# Altium PCB Hauptplatine.PcbDoc (part 3 of 3)
Units mm, origin at the board's own origin, x right, y up, seen from the top; angles counter-clockwise.
Board outline 110.5 x 110.5 mm, 4 copper layers (Top Layer, GND, POWER, Bottom Layer), stack 0.551 mm thick; 103 components, 92 nets, 407 pads, 378 vias.
Unrouted connection lines stored in the file: 3.
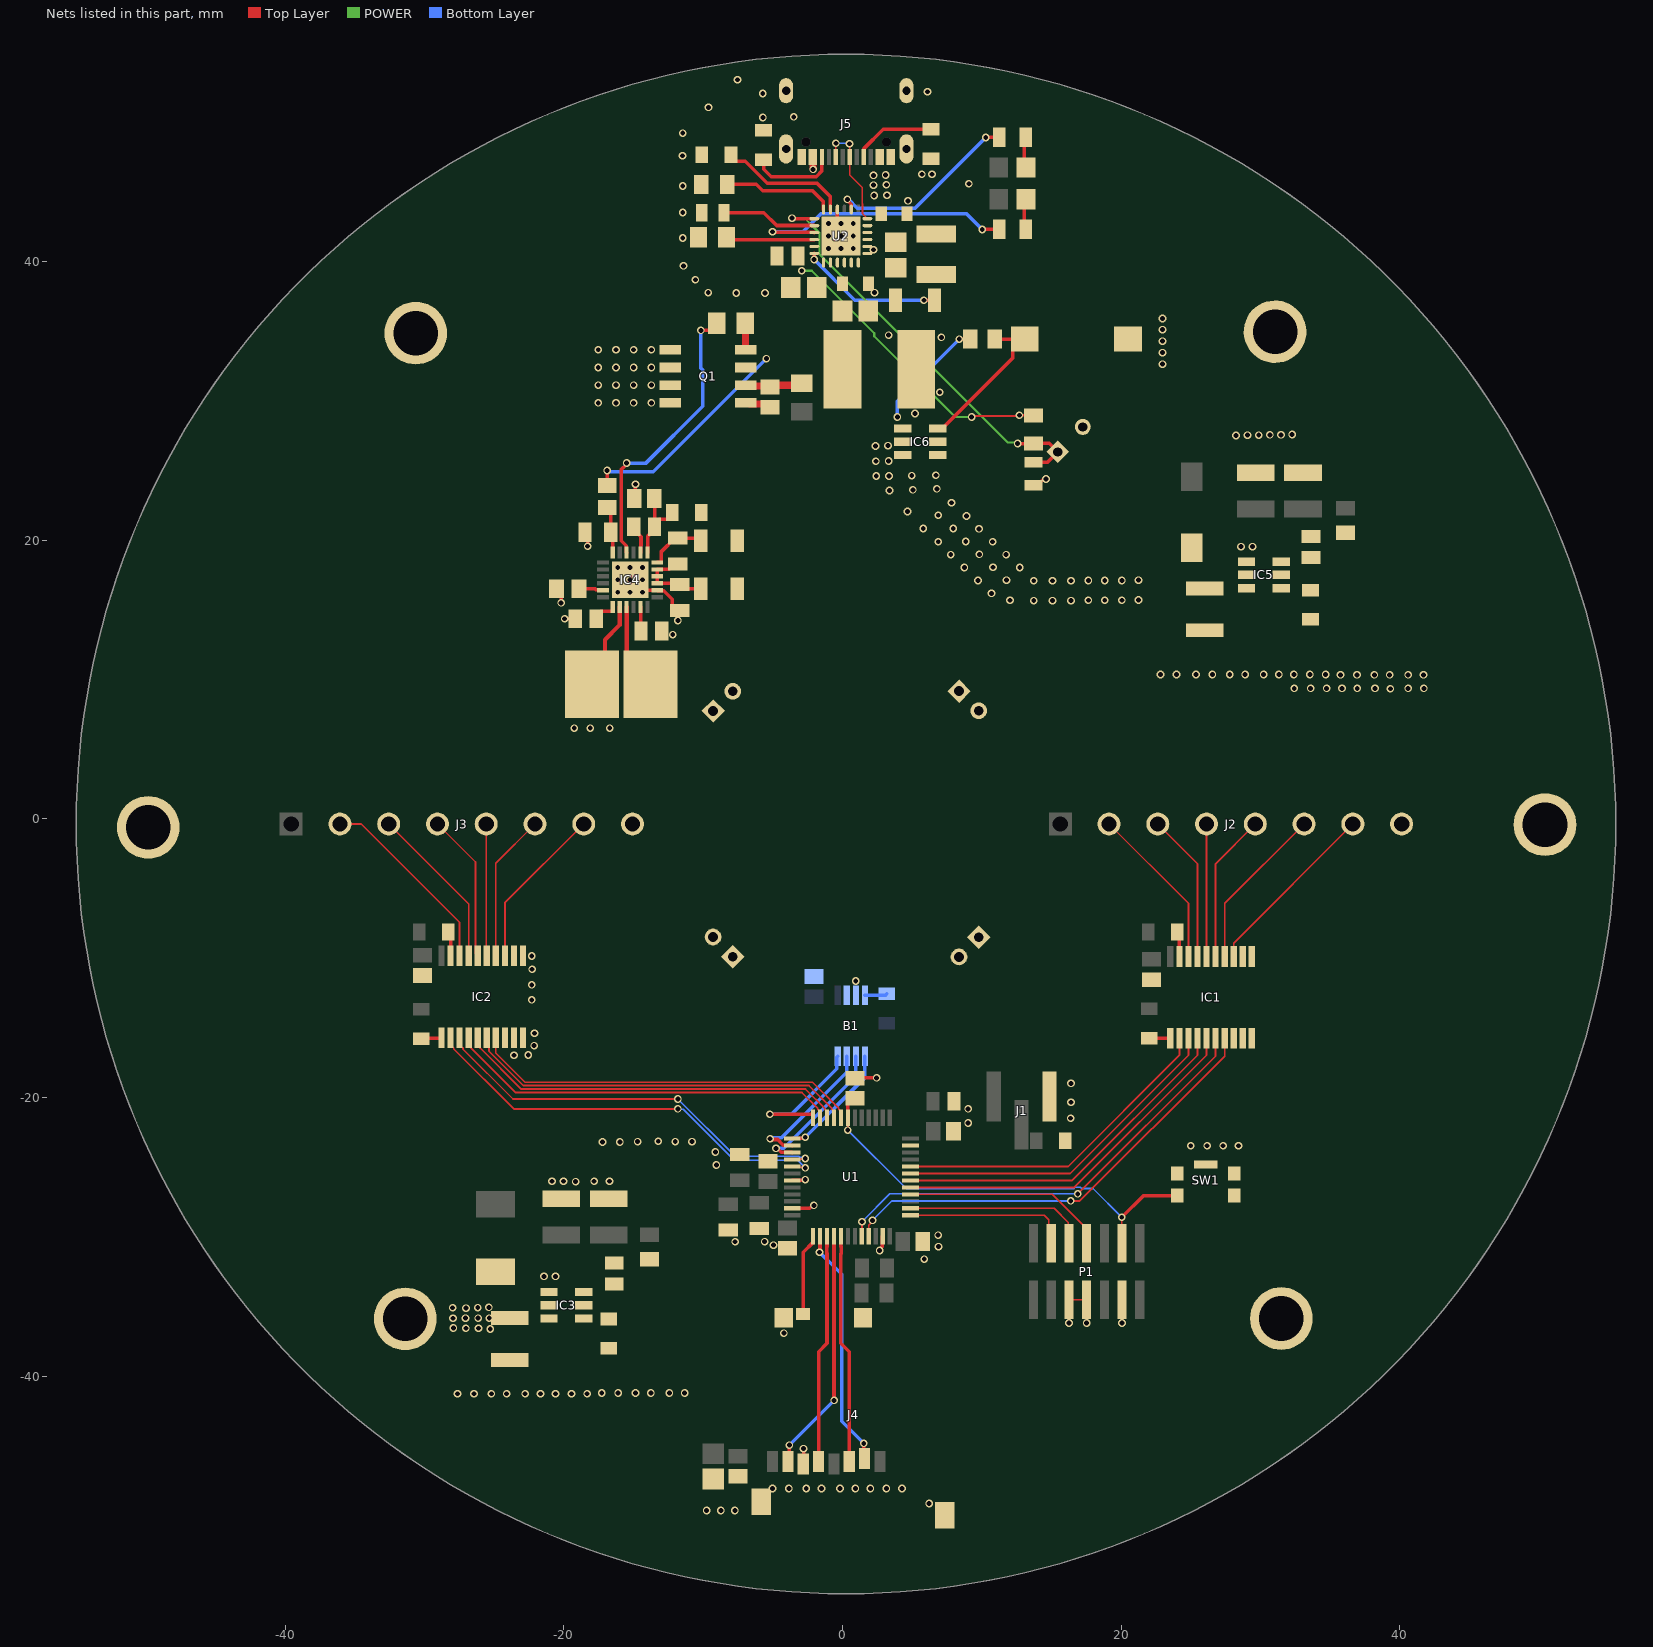
[diagram p4: the nets of this part, all layers, seen from the top]

## Via types
v1: diameter 0.55, hole 0.35, Top Layer to Bottom Layer, tented both sides, 378 vias

## Nets (pads, with @x,y where several pads share a name; then routed paths per layer and width w, separated by ;. In a path a pad name is that pad's centre, name@x,y a point inside that pad or via, vN(x,y) a via of type N, cw(c..) or ccw(c..) an arc to the next point about the centre after c; other vN are vias at no path point) (continued)
D_P: J5.A6 J5.B6 U2.24 | length 7.9
  Top Layer w0.11: J5.B6@-0.476,47.498 v1@-0.476,48.475 ; v1(0.5,48.445) 0.512,48.433 0.512,47.51 J5.A6@0.524,47.498 0.524,46.202 1.425,45.301 1.425,44.161 1.437,44.149 1.437,43.421 U2.24@1.79,43.068
  Bottom Layer w0.11: v1(-0.475,48.475) 0.47,48.475 v1(0.5,48.445)
DIS_FET: IC4.4 R15.1 | length 20.8
  Top Layer w0.254: v1(-15.494,25.527) -15.494,25.447 -15.875,25.066 -15.875,19.956 -15.513,19.594 -15.513,19.118 IC4.4@-15.49,19.095 ; v1(-10.16,35.052) -9.375,35.052 -9.017,35.41 R15.1@-9.017,35.56
  Bottom Layer w0.254: v1(-15.494,25.527) -14.097,25.527 -10.033,29.591 -10.033,32.218 -10.16,32.345 v1(-10.16,35.052)
GND: 32.2 B1.6 B1.7 C1.1 C2.1 C3.1 C4.1 C5.1 C6.1 C7.2 C8.2 C9.2 C10.2 C11.2 C12.1 C13.1 C14.1 C19.2 C20.2 C22.2 C27.2 C29.2 C30.2 C31.2 C32.2 C33.1 C34.2 C36.2 IC1.8 IC1.9 IC1.10 IC1.11 IC1.12 IC2.8 IC2.9 IC2.10 IC2.11 IC2.12 IC3.1 IC4.14 IC5.1 J1.3 J2.8 J3.8 J4.G1 J4.G2 J4.G3 J4.G4 J4.P6 J5.A1/B12 J5.A12/B1 J5.Shell MH1.1 MH2.1 MH3.1 MH4.1 MH5.1 MH6.1 P1.5 P1.7 P1.11 R5.2 R11.2 R14.2 R17.1 R21.2 R22.2 R23.2 R24.2 R25.1 R26.1 R28.2 R29.2 S1.1 SW1.A1 SW1.A2 SW1.G1 U1.19 U1.23 U1.35 U1.47 U2.4 U2.19 U2.20 U2.25 | length 24
  Top Layer w0.125: v1(16.256,-36.195) P1.5@16.256,-34.52 P1.7@17.526,-34.52 v1(17.526,-36.195) ; v1(20.066,-36.195) P1.11@20.066,-34.52
  Top Layer w0.254: IC2.8@-24.228,-15.712 IC2.8@-24.215,-15.725 ; C8.2@-8.212,-29.515 -8.052,-29.515 C8.2@-7.992,-29.575 ; C11.2@-7.493,-47.207 C11.2@-7.239,-47.461 ; C9.2@-5.969,-29.409 C9.2@-5.936,-29.409 ; J4.G2@-5.813,-49.008 -5.813,-48.96 J4.G2@-5.5,-48.647 ; C36.2@-4.699,40.386 C36.2@-4.699,40.586 ; v1@-4.213,-36.92 v1(-4.207,-36.926) ; J5.Shell@-4.046,48.068 J5.Shell@-3.919,47.941 ; J5.Shell@-4.046,51.972 J5.Shell@-4.046,52.248 ; U1.23@-3.611,-27.963 -2.343,-27.963 -2.13,-27.75 v1(-2.05,-27.75) ; U1.19@-3.611,-25.963 -3.588,-25.94 -2.699,-25.94 v1(-2.667,-25.908) ; J4.P6@-2.813,-46.328 -2.794,-46.309 v1(-2.794,-45.212) ; U2.4@-0.363,43.721 -0.363,42.068 v1(-0.113,41.818) ; C14.1@0.889,-18.616 0.905,-18.6 v1(2.45,-18.6) ; J4.G3@1.397,-35.918 J4.G3@1.487,-35.828 ; v1(2.667,-30.988) 2.667,-30.908 2.866,-30.709 2.866,-29.986 U1.35@2.889,-29.963 ; J5.A1/B12@3.474,47.228 J5.A1/B12@3.474,47.498 ; J5.Shell@4.594,47.456 J5.Shell@4.594,48.068 ; J5.Shell@4.594,51.78 J5.Shell@4.594,52.248 ; C27.2@4.637,43.427 C27.2@4.699,43.489 ; R28.2@6.2,47.371 R28.2@6.35,47.371 ; v1(6.223,-49.149) v1@6.229,-49.155 ; v1@8.974,-21.887 v1(9.017,-21.844) ; v1(9.017,-20.828) v1(9.017,-20.828) ; R23.2@13.716,23.938 13.991,23.938 14.38,24.327 14.548,24.327 v1(14.605,24.384) ; R5.2@16.002,-23.114 R5.2@16.002,-22.964 ; S1.1@20.447,34.383 S1.1@20.481,34.417
  Top Layer w0.305: R14.2@-17.05,11.212 -17.05,12.838 -15.99,13.898 IC4.14@-15.99,15.195
  Bottom Layer w0.254: v1(0.958,-11.646) v1@0.964,-11.652
  other v1: -9.75,-49.65 -8.725,-49.65 -7.725,-49.65 -5.025,-48.075 -3.85,-48.075 -2.6,-48.075 -1.5,-48.075 -0.175,-48.075 0.925,-48.075 2,-48.075 3.15,-48.075 4.275,-48.075 -27.625,-41.275 -26.45,-41.275 -25.2,-41.275 -24.1,-41.275 -22.775,-41.275 -21.675,-41.275 -20.6,-41.275 -19.45,-41.275 -18.325,-41.275 -17.275,-41.225 -16.1,-41.225 -14.85,-41.225 -13.75,-41.225 -12.425,-41.225 -11.325,-41.225 -21.425,-32.85 -20.6,-32.85 5.867,-31.613 6.892,-30.713 -4.953,-30.607 -7.704,-30.368 -5.588,-30.353 6.867,-29.888 -19.15,-26.05 -20.85,-26.025 -20.025,-26.025 -17.825,-26.025 -16.725,-26.025 -9.05,-24.85 -9.125,-23.925 25,-23.475 26.175,-23.475 27.325,-23.475 28.425,-23.475 -17.225,-23.2 -15.975,-23.2 -14.7,-23.175 -12,-23.175 -10.8,-23.175 -13.225,-23.15 16.375,-21.5 16.4,-20.35 16.4,-19 -23.575,-16.975 -22.554,-16.96 -22.129,-16.285 -22.1,-15.4 -22.297,-13.003 -22.297,-11.928 -22.272,-10.803 -22.297,-9.853 -19.25,6.5 -18.1,6.5 -16.7,6.5 39.325,9.325 32.425,9.35 33.6,9.35 34.75,9.35 35.85,9.35 36.95,9.35 38.225,9.35 40.6,9.35 41.725,9.35 35.75,10.325 36.925,10.325 38.175,10.325 39.275,10.325 40.6,10.325 41.7,10.325 22.825,10.35 23.975,10.35 25.375,10.35 26.55,10.35 27.8,10.35 28.9,10.35 30.225,10.35 31.325,10.35 32.4,10.35 33.55,10.35 34.675,10.35 28.6,19.525 29.425,19.525 28.25,27.5 29.075,27.525 29.875,27.525 30.675,27.55 31.475,27.55 32.275,27.575 5.207,29.083 6.985,30.607 22.975,32.625 22.975,33.45 22.975,34.275 7.095,34.544 3.316,34.706 22.975,35.1 22.975,35.9 -7.625,37.725 -5.561,37.731 -9.636,37.756 2.3,37.754 -10.561,38.681 -11.411,39.681 2.228,40.83 -1.002,40.929 -0.113,40.929 0.776,40.929 -11.461,41.681 -1.002,41.818 0.776,41.818 -1.002,42.707 -0.113,42.707 0.776,42.707 -11.461,43.506 4.699,44.34 -11.461,45.406 9.075,45.575 5.7,46.25 6.425,46.25 -11.486,47.581 -11.461,49.206 -5.711,50.331 -3.5,50.375 -9.611,51.056 -5.725,52.05 6.1,52.175 -7.536,53.031
Hall_MISO: B1.3 U1.14 | length 10.4
  Top Layer w0.254: v1(-5.188,-22.97) -5.131,-23.026 -4.654,-23.026 -4.24,-23.44 -3.634,-23.44 U1.14@-3.611,-23.463
  Bottom Layer w0.254: v1(-5.188,-22.97) -5.131,-22.913 -4.388,-22.913 0.314,-18.211 B1.3@0.314,-17.059
Hall_MOSI: B1.2 U1.15 | length 10.6
  Top Layer w0.254: v1(-4.766,-23.66) -4.686,-23.66 -4.406,-23.94 -3.634,-23.94 U1.15@-3.611,-23.963
  Bottom Layer w0.254: v1(-4.766,-23.66) -4.212,-23.66 0.964,-18.484 B1.2@0.964,-17.059
Hall_NSS: B1.4 U1.12 | length 10.4
  Top Layer w0.254: v1(-5.207,-21.209) -2.134,-21.209 -2.111,-21.232 U1.12@-2.111,-21.463
  Bottom Layer w0.254: v1(-5.207,-21.209) -3.659,-21.209 -0.4,-17.95 -0.4,-17.123 B1.4@-0.336,-17.059
Hall_SCK: B1.1 U1.13 | length 8.6
  Top Layer w0.254: U1.13@-3.611,-22.963 -3.588,-22.94 -2.827,-22.94 -2.747,-22.86 v1(-2.667,-22.86)
  Bottom Layer w0.254: v1(-2.667,-22.86) 1.614,-18.579 B1.1@1.614,-17.059
IC1_SW: C18.2 IC3.2 L1.1
IC2_SW: C28.2 IC5.2 L2.1
Matrix1_1: IC2.2 U1.17 | length 30.7
  Top Layer w0.125: IC2.2@-28.128,-15.712 -28.128,-16.225 -27.89,-16.462 -27.89,-16.527 -23.59,-20.828 v1(-11.811,-20.828) ; U1.17@-3.611,-24.963 -3.563,-25.011 -2.715,-25.011 v1(-2.667,-25.059)
  Bottom Layer w0.125: v1(-11.811,-20.828) -11.786,-20.853 -11.432,-20.853 -7.774,-24.511 -3.215,-24.511 v1(-2.667,-25.059)
Matrix1_2: IC2.3 U1.16 | length 29.7
  Top Layer w0.125: IC2.3@-27.478,-15.712 -27.478,-16.225 -27.24,-16.462 -27.24,-16.527 -23.648,-20.12 v1(-11.811,-20.12) ; U1.16@-3.611,-24.463 -3.571,-24.423 -2.706,-24.423 v1(-2.667,-24.384)
  Bottom Layer w0.125: v1(-11.811,-20.12) -7.704,-24.227 -3.146,-24.227 -3.07,-24.303 -2.748,-24.303 v1(-2.667,-24.384)
Matrix1_3: IC2.4 U1.11 | length 28.2
  Top Layer w0.125: IC2.4@-26.828,-15.712 -26.665,-15.875 -26.665,-16.452 -23.46,-19.658 -2.901,-19.658 -1.773,-20.785 -1.773,-20.851 -1.611,-21.013 U1.11@-1.611,-21.463
Matrix1_4: IC2.5 U1.10 | length 28.1
  Top Layer w0.125: IC2.5@-26.178,-15.712 -26.015,-15.875 -26.015,-16.452 -23.06,-19.408 -2.651,-19.408 -1.273,-20.785 -1.273,-20.85 -1.111,-21.013 U1.10@-1.111,-21.463
Matrix1_5: IC2.6 U1.9 | length 28.1
  Top Layer w0.125: IC2.6@-25.528,-15.712 -25.365,-15.875 -25.365,-16.682 -22.89,-19.158 -2.401,-19.158 -0.773,-20.785 -0.773,-20.851 -0.611,-21.013 U1.9@-0.611,-21.463
Matrix1_6: IC2.7 U1.8 | length 28.1
  Top Layer w0.125: IC2.7@-24.878,-15.712 -24.878,-16.816 -22.787,-18.908 -2.151,-18.908 -0.273,-20.785 -0.273,-20.851 -0.111,-21.013 U1.8@-0.111,-21.463
Matrix1_NOE: IC2.19 R4.2 | length 1.7
  Top Layer w0.254: R4.2@-28.325,-8.202 -28.128,-8.399 IC2.19@-28.128,-9.836
Matrix2_1: IC1.2 U1.44 | length 23.8
  Top Layer w0.125: U1.44@4.889,-24.963 16.197,-24.963 24.182,-16.978 IC1.2@24.182,-15.765
Matrix2_2: IC1.3 U1.43 | length 24.7
  Top Layer w0.125: U1.43@4.889,-25.463 16.347,-25.463 24.832,-16.978 IC1.3@24.832,-15.765
Matrix2_3: IC1.4 U1.42 | length 25.5
  Top Layer w0.125: U1.42@4.889,-25.963 16.497,-25.963 25.482,-16.978 IC1.4@25.482,-15.765
Matrix2_4: IC1.5 U1.41 | length 26.4
  Top Layer w0.125: U1.41@4.889,-26.463 16.647,-26.463 26.132,-16.978 IC1.5@26.132,-15.765
Matrix2_5: IC1.6 U1.32 | length 32.6
  Top Layer w0.125: U1.32@1.389,-29.963 1.396,-29.956 1.396,-28.931 v1(1.402,-28.924) ; v1(16.891,-26.924) 26.782,-17.033 IC1.6@26.782,-15.765
  Bottom Layer w0.125: v1(1.402,-28.924) 3.402,-26.924 v1(16.891,-26.924)
Matrix2_6: IC1.7 U1.33 | length 32.7
  Top Layer w0.125: U1.33@1.889,-29.963 1.889,-29.175 2.159,-28.905 v1(2.159,-28.829) ; v1(16.383,-27.432) 17.037,-27.432 27.432,-17.037 IC1.7@27.432,-15.765
  Bottom Layer w0.125: v1(2.159,-28.829) 3.556,-27.432 v1(16.383,-27.432)
Matrix2_NOE: IC1.19 R2.2 | length 1.8
  Top Layer w0.254: R2.2@24.044,-8.128 24.182,-8.266 IC1.19@24.182,-9.889
NetB1_8: B1.8 R6.2 | length 1.6
  Bottom Layer w0.254: B1.8@1.614,-12.659 3.089,-12.659 R6.2@3.175,-12.573
NetC15_1: C15.1 IC4.2 | length 2.1
  Top Layer w0.254: C15.1@-14.986,20.955 -14.986,20.755 -14.459,20.228 -14.459,19.594 -14.467,19.586 -14.467,19.118 IC4.2@-14.49,19.095
NetC15_2: C15.2 C16.2 IC4.1 R32.2 | length 5.9
  Top Layer w0.254: IC4.1@-13.99,19.095 -13.99,20.251 -13.486,20.755 C15.2@-13.486,20.955 ; C16.2@-13.462,22.86 -13.486,22.836 C15.2@-13.486,20.955 ; R32.2@-12.226,21.971 -12.226,21.821 -12.549,21.498 -13.138,21.498 -13.486,21.15 C15.2@-13.486,20.955
NetC17_1: C17.1 IC4.6 R7.1 | length 3.2
  Top Layer w0.254: R7.1@-16.764,22.225 -16.637,22.098 C17.1@-16.637,20.574 -16.49,20.427 IC4.6@-16.49,19.095
NetC18_1: C18.1 IC3.6
NetC21_1: C21.1 IC4.24 R9.2 | length 4.4
  Top Layer w0.254: IC4.24@-13.29,18.395 -13.015,18.395 -12.992,18.418 -12.992,19.182 -12.036,20.138 C21.1@-11.811,20.138 -10.359,20.138 R9.2@-10.16,19.939
NetC21_2: C21.2 C23.1 IC4.21 IC4.22 IC4.23 R10.2 | length 5.9
  Top Layer w0.254: C21.2@-11.811,18.288 -12.036,18.288 -12.429,17.895 IC4.23@-13.29,17.895 IC4.22@-13.29,17.395 IC4.21@-13.29,16.895 -11.815,16.895 -11.811,16.891 -11.463,16.543 -11.052,16.543 -11.019,16.51 R10.2@-10.16,16.51
NetC24_1: C24.1 Q1.2 R13.2 | length 3.9
  Top Layer w0.508: Q1.2@-6.94,31.115 -6.876,31.051 -5.271,31.051 C24.1@-5.207,30.988 -5.083,31.112 -3.32,31.112 R13.2@-3.197,31.235
NetC25_1: C25.1 IC4.17 | length 1.7
  Top Layer w0.254: IC4.17@-14.49,15.195 -14.467,15.172 -14.467,14.741 -14.466,14.74 C25.1@-14.466,13.462
NetC26_1: C26.1 IC4.13 | length 1.8
  Top Layer w0.254: C26.1@-17.677,14.351 -17.677,14.551 -17.329,14.899 -16.513,14.899 -16.49,14.922 IC4.13@-16.49,15.195
NetC28_1: C28.1 IC5.6
NetC35_1: C35.1 C37.2 L3.1 U2.17 U2.18
NetC35_2: C35.2 U2.12 | length 10.3
  Top Layer w0.254: v1(-2.032,40.132) -2.024,40.14 -2.024,40.561 U2.12@-2.016,40.568 ; v1(5.842,37.211) C35.2@6.61,37.211
  Bottom Layer w0.254: v1(-2.032,40.132) 0.889,37.211 v1(5.842,37.211)
NetC37_1: C37.1 L3.2 U2.21 U2.22
NetIC1_1: IC1.1 R1.2 | length 1.5
  Top Layer w0.254: R1.2@22.012,-15.748 23.515,-15.748 IC1.1@23.532,-15.765
NetIC1_13: IC1.13 J2.7 | length 13
  Top Layer w0.125: IC1.13@28.082,-9.889 28.082,-8.931 J2.7@36.632,-0.381
NetIC1_14: IC1.14 J2.6 | length 11.9
  Top Layer w0.125: IC1.14@27.432,-9.889 27.432,-6.081 J2.6@33.132,-0.381
NetIC1_15: IC1.15 J2.5 | length 10.7
  Top Layer w0.125: IC1.15@26.782,-9.889 26.782,-3.231 J2.5@29.632,-0.381
NetIC1_16: IC1.16 J2.4 | length 9.5
  Top Layer w0.125: IC1.16@26.132,-9.889 J2.4@26.132,-0.381
NetIC1_17: IC1.17 J2.3 | length 10.7
  Top Layer w0.125: J2.3@22.632,-0.381 25.482,-3.231 IC1.17@25.482,-9.889
NetIC1_18: IC1.18 J2.2 | length 11.9
  Top Layer w0.125: J2.2@19.132,-0.381 24.832,-6.081 IC1.18@24.832,-9.889
NetIC2_1: IC2.1 R3.2 | length 1.3
  Top Layer w0.254: R3.2@-30.044,-15.763 -28.829,-15.763 IC2.1@-28.778,-15.712
NetIC2_13: IC2.13 J3.7 | length 11.8
  Top Layer w0.125: IC2.13@-24.228,-9.836 -24.228,-6.041 J3.7@-18.568,-0.381
NetIC2_14: IC2.14 J3.6 | length 10.6
  Top Layer w0.125: IC2.14@-24.878,-9.836 -24.878,-3.191 J3.6@-22.068,-0.381
NetIC2_15: IC2.15 J3.5 | length 9.5
  Top Layer w0.125: J3.5@-25.568,-0.381 -25.568,-9.796 IC2.15@-25.528,-9.836
NetIC2_16: IC2.16 J3.4 | length 10.7
  Top Layer w0.125: J3.4@-29.068,-0.381 -26.34,-3.109 -26.34,-9.674 IC2.16@-26.178,-9.836
NetIC2_17: IC2.17 J3.3 | length 11.8
  Top Layer w0.125: J3.3@-32.568,-0.381 -26.828,-6.121 IC2.17@-26.828,-9.836
NetIC2_18: IC2.18 J3.2 | length 13.9
  Top Layer w0.125: J3.2@-36.068,-0.381 -34.544,-0.381 -27.478,-7.447 IC2.18@-27.478,-9.836
NetIC3_4: IC3.4 R8.1 R11.1
NetIC4_11: IC4.11 R12.1 | length 1.5
  Top Layer w0.254: R12.1@-18.669,16.51 -17.748,16.51 -17.656,16.418 -17.213,16.418 IC4.11@-17.19,16.395
NetIC5_4: IC5.4 R19.1 R24.1
NetIC6_3: IC6.3 R27.1 S1.2 | length 11.4
  Top Layer w0.254: IC6.3@6.838,28.001 7.163,28.001 12.208,33.046 12.208,33.644 12.981,34.417 S1.2@13.081,34.417 R27.1@10.922,34.417
NetJ5_A5: J5.A5 R28.1 | length 6
  Top Layer w0.254: J5.A5@1.524,47.498 1.547,47.521 1.547,48.097 2.921,49.471 R28.1@6.35,49.471
NetJ5_B5: J5.B5 R29.1 | length 6.3
  Top Layer w0.254: R29.1@-5.675,47.3 -5.643,47.268 -5.643,46.618 -5.099,46.074 -1.89,46.074 -1.476,46.487 J5.B5@-1.476,47.498
NetLED1_1: LED1.1 U2.2 | length 14
  Top Layer w0.254: v1(0.355,44.45) 0.355,44.37 0.63,44.095 0.63,43.728 U2.2@0.637,43.721 ; v1(10.287,48.895) LED1.1@11.115,48.895
  Bottom Layer w0.254: v1(0.355,44.45) 0.434,44.45 1.071,43.813 5.205,43.813 v1(10.287,48.895)
NetLED1_2: LED1.2 R16.1 | length 2.2
  Top Layer w0.254: LED1.2@13.015,48.895 13.041,48.869 R16.1@13.041,46.736
NetLED2_1: LED2.1 U2.9 | length 20.2
  Top Layer w0.254: v1(-5.025,42.125) -4.975,42.075 -2.023,42.075 U2.9@-2.016,42.068 ; v1(10.033,42.291) LED2.1@11.115,42.291
  Bottom Layer w0.254: v1(-5.025,42.125) -2.833,42.125 -1.524,43.434 8.89,43.434 v1(10.033,42.291)
NetLED2_2: LED2.2 R18.1 | length 2.2
  Top Layer w0.254: LED2.2@13.015,42.291 13.041,42.317 R18.1@13.041,44.45
NetQ1_4: Q1.4 R15.2 | length 1.7
  Top Layer w0.508: R15.2@-6.961,35.38 -6.961,33.676 Q1.4@-6.94,33.655
NetQ1_5: Q1.5 Q1.6 Q1.7 Q1.8
  other v1: -17.526,29.845 -16.256,29.845 -14.986,29.845 -13.716,29.845 -17.526,31.115 -16.256,31.115 -14.986,31.115 -13.716,31.115 -17.526,32.385 -16.256,32.385 -14.986,32.385 -13.716,32.385 -17.526,33.655 -16.256,33.655 -14.986,33.655 -13.716,33.655
NetR17_2: R17.2 U2.6 | length 8
  Top Layer w0.254: R17.2@-8.275,45.525 -6.175,45.525 -5.725,45.075 -2.15,45.075 -1.363,44.288 U2.6@-1.363,43.721
NetR21_1: R21.1 U2.10 | length 6.2
  Top Layer w0.254: R21.1@-8.25,41.568 U2.10@-2.016,41.568
NetR25_2: R25.2 U2.5 | length 9.4
  Top Layer w0.254: R25.2@-8,47.65 -8,47.5 -7.677,47.177 -6.977,47.177 -5.4,45.6 -1.825,45.6 -0.863,44.638 U2.5@-0.863,43.721
NetR26_2: R26.2 U2.8 | length 6.9
  Top Layer w0.254: R26.2@-8.5,43.5 -5.641,43.5 -4.716,42.575 -2.023,42.575 U2.8@-2.016,42.568
NRST: C14.2 P1.12 SW1.B1 SW1.B2 U1.7 | length 31.4
  Top Layer w0.125: v1(0.381,-22.352) 0.389,-22.344 U1.7@0.389,-21.463 ; v1(20.047,-28.607) 20.047,-30.461 P1.12@20.066,-30.48
  Top Layer w0.254: U1.7@0.389,-21.463 0.389,-20.464 0.787,-20.066 C14.2@0.889,-20.066 ; v1(20.047,-28.607) 21.604,-27.05 SW1.B1@24.025,-27.05
  Bottom Layer w0.125: v1(0.381,-22.352) 4.572,-26.543 16.618,-26.543 16.699,-26.461 17.083,-26.461 17.164,-26.543 17.984,-26.543 v1(20.047,-28.607)
REGN: C36.1 R20.1 U2.11 | length 21.6
  Top Layer w0.158: v1(9.271,28.829) 9.335,28.892 12.636,28.892 v1(12.7,28.956) 13.7,28.956 R20.1@13.716,28.94
  Top Layer w0.254: C36.1@-3.199,40.186 C36.1@-3.199,40.386 C36.1@-3.199,40.586
  POWER w0.158: v1(-2.925,39.325) -2.2,39.325 2.284,34.841 2.284,34.631 8.086,28.829 v1(9.271,28.829)
SD_DETECT: J4.P9 U1.25 | length 5.9
  Top Layer w0.254: J4.P9@-2.823,-35.553 -2.823,-31.125 -2.111,-30.413 U1.25@-2.111,-29.963
SD_MISO: J4.P7 U1.28 | length 17.5
  Top Layer w0.254: J4.P7@-3.913,-46.128 -3.81,-46.025 v1(-3.81,-44.958) ; U1.28@-0.611,-29.963 -0.606,-29.968 -0.606,-41.744 v1(-0.601,-41.749)
  Bottom Layer w0.254: v1(-3.81,-44.958) v1(-0.601,-41.749)
SD_MOSI: J4.P3 U1.29 | length 16.4
  Top Layer w0.254: U1.29@-0.111,-29.963 -0.111,-30.705 -0.074,-30.741 -0.074,-31.178 -0.111,-31.215 -0.111,-37.66 0.487,-38.258 J4.P3@0.487,-46.128
SD_NSS: J4.P2 U1.26 | length 17.3
  Top Layer w0.254: v1(-1.651,-31.115) -1.611,-31.075 U1.26@-1.611,-29.963 ; v1(1.524,-44.831) 1.524,-45.865 J4.P2@1.587,-45.928
  Bottom Layer w0.254: v1(-1.651,-31.115) -0.063,-32.703 -0.063,-43.244 v1(1.524,-44.831)
SD_SCK: J4.P5 U1.27 | length 16.4
  Top Layer w0.254: J4.P5@-1.713,-46.128 -1.713,-38.26 -1.111,-37.658 -1.111,-31.195 -1.124,-31.182 -1.124,-30.897 -1.128,-30.893 -1.128,-30.741 -1.111,-30.724 U1.27@-1.111,-29.963
SWCLK: P1.6 U1.38 | length 13.3
  Top Layer w0.125: U1.38@4.889,-27.963 15.188,-27.963 16.211,-28.986 16.211,-30.435 P1.6@16.256,-30.48
SWDIO: P1.4 U1.37 | length 11.8
  Top Layer w0.125: U1.37@4.889,-28.463 14.488,-28.463 14.8,-28.775 14.8,-30.294 P1.4@14.986,-30.48
SWO: P1.8 U1.40 | length 14.7
  Top Layer w0.125: U1.40@4.889,-26.963 15.064,-26.963 17.526,-29.425 P1.8@17.526,-30.48
TS: R20.2 R22.1 R23.1 U2.7 | length 30.6
  Top Layer w0.254: v1(-3.625,43.102) -3.598,43.075 -2.023,43.075 U2.7@-2.016,43.068 ; v1(12.573,26.924) 13.7,26.924 R20.2@13.716,26.94 14.839,26.94 R22.1@15.452,26.327 14.717,25.592 R23.1@13.716,25.592
  POWER w0.158: v1(-3.625,43.102) -2.716,43.102 -1.651,42.037 -1.651,40.513 11.863,26.999 12.498,26.999 v1(12.573,26.924)
VBAT: C19.1 Q1.3 R7.2 U2.13 U2.14 | length 15.7
  Top Layer w0.254: R7.2@-16.891,23.908 v1(-16.891,24.987)
  Bottom Layer w0.254: v1@-16.764,24.892 -13.589,24.892 v1(-5.461,33.02)
VBOT: C16.1 C17.2 C23.2 C25.2 C26.2 IC4.15 IC4.20 IC4.25 P4.1 P5.1 R12.2 R14.1 | length 16.3
  Top Layer w0.254: R12.2@-20.511,16.51 -20.193,16.192 v1(-20.193,15.494) ; v1(-19.939,14.351) C26.2@-19.177,14.351 ; C17.2@-18.487,20.574 -18.288,20.375 v1(-18.288,19.558) ; v1(-15.24,17.145) -14.49,16.395 IC4.20@-13.29,16.395 -13.267,16.372 -12.836,16.372 -12.212,15.748 -12.212,15.298 -11.864,14.95 C23.2@-11.684,14.95 -11.811,14.823 v1(-11.811,14.224) ; C16.1@-14.912,22.86 -14.859,22.913 v1(-14.859,24.003) ; C25.2@-12.966,13.462 C25.2@-12.712,13.208
  Top Layer w0.305: IC4.15@-15.49,15.195 -15.49,11.365 R14.1@-13.775,9.65
  other v1: -12.18,13.208 -16.129,16.256 -15.24,16.256 -14.351,16.256 -16.129,17.145 -14.351,17.145 -16.129,18.034 -15.24,18.034 -14.351,18.034
VBUS: C27.1 J5.A4/B9 J5.A9/B4 U2.23 | length 0.9
  Top Layer w0.508: J5.A9/B4@-2.126,47.498 -2.126,46.619 v1(-2.108,46.601) ; v1(2.225,46.175) v1@2.233,46.183
  other v1: 2.275,44.725 3.2,44.75 2.225,45.475 3.15,45.5 3.1,46.2
VMID: P2.1 P3.1 P4.2 P5.2 R10.1
VSWITCH: C29.1 C30.1 C33.2 IC6.4 R27.2 U2.15 U2.16 | length 8.2
  Top Layer w0.254: v1(8.382,34.417) R27.2@9.168,34.417
  Bottom Layer w0.254: v1(3.937,28.829) 3.937,29.972 v1(8.382,34.417)
VSYS: C22.1 C34.1 IC3.3 IC3.5 IC5.3 IC5.5 IC6.1 IC6.2 IC6.5 IC6.6
  other v1: -25.276,-36.621 -27.026,-36.571 -26.126,-36.571 -27.925,-36.55 -27.95,-35.85 -27.051,-35.846 -26.151,-35.846 -25.351,-35.846 -27.025,-35.125 -27.975,-35.1 -26.176,-35.096 -25.376,-35.071 13.725,15.65 15.075,15.65 16.4,15.65 12.021,15.674 17.65,15.675 18.825,15.675 20.05,15.675 21.25,15.7 10.7,16.175 13.725,17.075 15.075,17.075 16.4,17.075 9.725,17.1 17.65,17.1 18.825,17.1 20.05,17.1 11.775,17.125 21.25,17.125 8.75,18.025 12.725,18.025 10.8,18.05 7.775,18.95 11.75,18.95 9.825,18.975 6.875,19.875 10.775,19.875 8.85,19.9 9.8,20.8 5.8,20.825 7.95,20.825 8.9,21.725 6.875,21.775 4.671,22.049 7.825,22.675 3.375,23.55 5.05,23.6 6.775,23.675 3.339,24.599 2.425,24.6 4.975,24.625 6.7,24.65 2.4,25.65 3.314,25.674 2.375,26.75 3.264,26.774
VTOP: C24.2 P2.2 P3.2 Q1.1 R9.1 R32.1 | length 1.9
  Top Layer w0.508: Q1.1@-6.94,29.845 -6.775,29.845 -6.679,29.749 -5.418,29.749 C24.2@-5.207,29.538
pads on no net: IC4.5 IC4.7 IC4.10 IC4.12 IC4.16 IC4.18 IC4.19 J4.P1 J4.P8 J5.A8 J5.B8 J5.MH1 J5.MH2 P1.1 P1.2 P1.9 P1.10 P1.13 P1.14 U1.2 U1.3 U1.4 U1.5 U1.6 U1.18 U1.22 U1.34 U1.39 U1.46 U2.3

## Polygon pours and split planes (outlines as drawn)
REGN on Top Layer "REGN_L01_P276" (solid, pour order 276): -2.525,40.775 -2.45,40.85 -1.775,40.85 -1.65,40.975 -1.65,41.175 -1.775,41.3 -3.675,41.3 -3.813,41.162 -3.813,39.794 -3.043,39.025 -2.725,39.025 -2.525,39.225
VBAT on Top Layer (solid, pour order 275): -1.522,40.178 -1.42,40.28 -0.801,40.28 -0.703,40.182 -0.718,37.884 -1.196,37.288 -1.196,36.904 -1.625,36.475 -1.625,34.372 -1.63,34.367 -1.625,34.362 -1.625,32.25 -1.775,32.1 -3.9,32.1 -4.123,31.877 -7.677,31.877 -7.811,32.011 -7.811,32.739 -7.657,32.893 -5.969,32.893 -5.75,33.112 -5.75,36.65 -5.375,37.025 -2.9,37.025 -2.633,37.292 -2.633,38.883 -1.522,39.994
VSWITCH on Top Layer (solid, pour order 266): 2.45,34.9 2.009,35.341 1.157,35.341 0.825,35.674 0.825,37.706 0.775,37.756 0.775,39.104 0.375,39.504 0.375,40.175 0.264,40.286 -0.411,40.289 -0.575,40.125 -0.575,37.587 -0.962,37.2 -0.962,36.838 -1.383,36.417 -1.383,28.001 -0.856,27.525 4.925,27.525 5.066,27.666 5.066,28.084 2.45,30.7
VTOP on Top Layer "Top Layer-VTOP" (solid, pour order 115): -4.445,28.62 -2.735,26.91 -1.61,26.91 14.025,11.275 14.025,-13.025 11.9,-15.15 11.913,-15.163 10.887,-15.163 5.81,-10.085 5.81,-8.215 9.906,-4.119 9.906,3.702 8.166,5.441 8.16,5.435 8.16,7.271 9.657,8.768 9.65,9.273 -0.127,19.05 -8.5,19.05 -8.725,19.275 -8.725,19.3 -8.725,20.825 -8.982,21.082 -10.414,21.082 -10.668,21.336 -10.668,22.606 -10.668,29.332 -9.774,30.226 -4.7,30.226 -4.45,29.976 -4.445,29.975
GND on Top Layer "GND_L01_P267" (solid, pour order 267): 0.95,38.9 1.15,39.1 2.525,39.1 3.075,38.55 3.075,36.275 3.1,36.275 3.275,36.1 6.9,36.1 7.5,35.5 7.5,29 7.125,28.625 4.85,28.625 2.725,30.75 2.725,35.1 2.325,35.5 1.275,35.5 0.95,35.825
GND on Top Layer (solid, pour order 251): -11.875,38.975 -10.175,37.275 -3.05,37.275 -2.925,37.4 -2.925,38.7 -3.95,39.725 -3.95,41.075 -4.1,41.225 -5.2,41.225 -5.675,40.75 -8.95,40.75 -9.45,41.25 -9.45,48 -8.925,48.525 -7.5,48.525 -6.975,48 -4.9,48 -4.725,47.825 -4.725,47 -4.475,46.75 -2.625,46.75 -2.525,46.85 -2.525,47.825 -3.125,48.425 -3.125,49.625 -2.55,50.2 5.075,50.2 7.3,50.2 7.5,50 7.5,48.725 7.125,48.35 5.975,48.35 5.125,49.2 4.125,49.2 4,49.075 4,48.775 3.174,47.949 3.174,46.895 4.25,46.25 4.25,43 4.425,42.825 8.95,42.825 9.625,43.5 9.625,52.587 8.5,53.525 -7.725,53.525 -11.875,49.375
NetC37_1 on Top Layer (solid, pour order 270): 3.2,40.6 3.075,40.725 3.075,41.009 2.639,41.445 1.519,41.456 1.425,41.55 1.425,42.111 1.517,42.203 2.05,42.197 3.816,42.197 4.247,42.65 8.125,42.65 8.4,42.375 8.4,40.9 8.1,40.6
GND on Top Layer "GND_L01_P034" (solid, pour order 34): 2.616,40.167 2.94,40.492 2.94,40.956 2.586,41.31 1.157,41.31 1.157,40.499 1.489,40.167
NetC35_1 on Top Layer (solid, pour order 269): 2.622,39.278 3.225,38.675 3.225,36.45 3.4,36.275 4.9,36.275 4.925,36.25 5.075,36.4 5.075,38.05 5.05,38.075 5.325,38.35 8.25,38.35 8.4,38.5 8.4,40.25 8.2,40.45 3.091,40.45 2.671,40.03 1.43,40.03 1.194,40.273 0.592,40.273 0.504,40.186 0.504,39.569 0.503,39.567 0.792,39.278
NetQ1_5 on Top Layer "NETQ1_5_L01_P056" (solid, pour order 56): -17.806,28.956 -18.288,29.425 -18.288,34.025 -18.3,34.044 -17.8,34.544 -13.335,34.544 -12.827,34.036 -11.557,34.036 -11.557,29.464 -12.954,29.464 -13.462,28.956
GND on Top Layer (solid, pour order 156): 4.65,-36.625 5.125,-37.1 5.124,-37.125 5.124,-46.95 4.425,-47.65 -5.825,-47.65 -6.8,-46.675 -10.075,-46.675 -10.625,-46.125 -10.625,-41.198 -10.176,-40.753 -7.251,-40.751 -3.525,-37.025 -3.525,-34.675 -3.125,-34.275 -3.125,-30.4 -3.275,-30.25 -4.675,-30.25 -4.975,-29.95 -4.975,-28.775 -5.275,-28.475 -10.45,-28.475 -12.7,-30.725 -12.7,-36.35 -13.243,-36.893 -13.25,-36.893 -20.32,-36.893 -20.955,-37.529 -28.118,-37.528 -28.702,-38.113 -28.702,-41.198 -27.875,-42.025 -14.725,-42.025 -13.775,-42.975 -13.775,-46.45 -9.2,-51.025 8.299,-51.025 8.5,-50.8 8.5,-29.525 8.3,-29.325 5.255,-29.325 5.1,-29.466 5.1,-34.65 4.775,-34.975 0.95,-34.975 0.75,-35.175 0.75,-36.475 0.9,-36.625
5V on Top Layer (solid, pour order 212): -29.625,-14.15 -29.45,-13.975 -29.45,-12.1 -29.475,-12.075 -30.825,-12.075 -31.025,-11.875 -31.025,-10.65 -30.95,-10.575 -28.65,-10.575 -28.4,-10.325 -28.4,-9.3 -29.3,-8.4 -29.3,-7.3 -29.45,-7.15 -31.675,-7.15 -38,-0.825 -38,2.7 -38.5,3.2 -40.825,3.2 -41.325,2.7 -41.325,-4.475 -31.975,-13.825 -31.975,-13.9 -31.725,-14.15
GND on Top Layer (solid, pour order 255): 21.194,14.269 21.194,10.506 22.425,9.275 31.35,9.275 38.975,1.65 38.975,0.3 29.6,-9.075 28.575,-9.075 28.425,-9.225 28.425,-10.775 28.25,-10.95 28.25,-10.925 21.6,-10.925 21.425,-11.1 21.425,-11.975 21.603,-12.153 27.478,-12.153 27.775,-12.45 27.775,-17.4 23.438,-21.737 23.438,-25.825 23.638,-26.025 29.225,-26.025 29.725,-25.525 29.725,-16.55 31.875,-14.4 42.3,-3.975 42.3,2.725 42.3,12.825 39.589,15.536 29.576,15.536 28.89,14.85 21.775,14.85
GND on Top Layer (solid, pour order 234): 16.375,32.775 16.775,32.375 22.475,32.375 28.125,26.725 28.142,26.725 28.137,26.719 28.137,26.713 28.115,24.07 28.553,23.632 34.345,23.632 34.575,23.862 34.575,26.588 34.563,26.6 34.575,26.6 24.7,36.475 16.85,36.475 16.375,36
NetC28_1 on Top Layer "NETC28_1_L01_P228" (solid, pour order 228): 30.642,19.447 30.82,19.625 34.63,19.625 34.833,19.422 34.833,18.279 34.605,18.05 33.055,18.05 31.912,18.05 30.769,18.05 30.642,18.177
NetIC5_4 on Top Layer "Top Layer-NetIC1_4" (solid, pour order 227): 35.045,21.053 35.289,21.297 36.682,21.297 36.925,21.053 36.925,16.075 36.519,15.669 30.981,15.669 30.702,15.948 30.702,16.812 30.829,16.939 32.15,16.939 33.013,17.802 34.588,17.802 35.045,18.259
IC2_SW on Top Layer "Top Layer-IC1_SW" (solid, pour order 224): 21.2,21.048 21.53,21.378 34.713,21.378 34.8,21.291 34.8,20.145 34.687,20.032 28.111,20.032 28.111,20.031 27.96,19.88 27.956,19.88 27.956,18.178 27.945,18.172 28.27,17.839 29.559,17.839 29.666,17.732 29.666,17.17 29.664,17.17 29.569,17.075 27.866,17.075 27.042,17.899 23.588,17.899 21.551,17.899 21.2,18.25
5V on Top Layer (solid, pour order 223): 20.589,21.511 19.925,22.175 19.925,28.763 20.592,29.225 25.45,29.225 27.946,26.729 27.946,23.901 28.454,23.393 34.55,23.393 34.728,23.571 34.728,26.593 35.135,27 38.061,27 38.625,26.412 38.625,22.05 38.088,21.513 28.391,21.513
VBUS on Top Layer "VBUS_L01_P047" (solid, pour order 47): 3.024,48.001 2.908,48.117 2.389,48.117 2.322,48.049 2.322,46.822 1.875,46.375 1.875,44.25 2.286,43.839 2.286,42.91 2.159,42.783 1.458,42.783 1.416,42.741 1.416,42.459 1.519,42.356 3.681,42.356 4.075,42.75 4.075,46.176 3.024,46.747
VBOT on Top Layer (solid, pour order 265): -15.6,7.275 -13.619,5.294 -13.619,-13.266 -11.494,-15.391 -11.506,-15.404 -10.481,-15.404 -5.404,-10.326 -5.404,-8.457 -5.461,-8.399 -5.461,-6.985 -9.144,-3.302 -9.144,4.227 -7.788,5.583 -7.788,7.588 -10.9,10.7 -10.9,15.25 -11.075,15.425 -12.176,15.425 -13.55,14.051 -13.55,12.35 -13.825,12.075 -15.375,12.075 -15.6,11.85
GND on Top Layer (solid, pour order 263): -20.5,-17.375 -13.875,-10.75 -13.875,5.1 -16.025,7.25 -16.025,11.75 -16.35,12.075 -19.725,12.075 -19.925,11.875 -19.925,5.45 -17.2,2.725 -17.2,-2.975 -22.55,-8.325 -23.225,-9 -23.775,-9 -23.875,-9.1 -23.875,-10.7 -24.025,-10.85 -29.25,-10.85 -29.375,-10.725 -30.775,-10.725 -30.9,-10.85 -30.9,-11.675 -30.65,-11.925 -24.525,-11.925 -24.525,-16.85 -24,-17.375
VMID on Top Layer "VMID_L01_P094" (solid, pour order 94): -8.525,18.825 -9.017,18.333 -9.017,9.017 -7.675,7.675 -4.425,7.675 -4.425,18.081 -5.147,18.825
GND on Top Layer (solid, pour order 168): 4.164,-23.6 4.214,-23.65 5.802,-23.65 6.327,-24.175 8.564,-24.175 9.464,-23.275 9.464,-19.75 9.239,-19.525 7.639,-19.525 7.389,-19.775 7.389,-23.05 7.139,-23.3 4.214,-23.3 4.164,-23.35
3V3 on Top Layer (solid, pour order 142): -28.384,-30.914 -28.702,-30.6 -28.702,-23.13 -28.081,-22.7 -22.05,-22.7 -21.819,-22.931 -21.819,-28.524 -21.311,-29.032 -15.215,-29.032 -15.037,-28.854 -15.037,-25.832 -14.605,-25.4 -4.75,-25.4 -4.572,-25.578 -4.572,-26.162 -4.445,-26.289 -3.011,-26.289 -2.921,-26.379 -2.921,-27.096 -3.003,-27.178 -4.328,-27.178 -4.4,-27.25 -4.4,-28.2 -4.3,-28.3 -2.3,-28.3 -2.2,-28.4 -2.2,-28.85 -2.4,-29.05 -2.75,-29.05 -2.825,-29.125 -2.825,-29.85 -3.05,-30.075 -4.55,-30.075 -4.775,-29.85 -4.775,-28.625 -5.075,-28.325 -10.52,-28.325 -13.106,-30.912 -21.374,-30.912
3V3 on Top Layer "3V3_L01_P143" (solid, pour order 143): -10.1,-46.468 -6.717,-46.468 -6.482,-46.233 -6.482,-41.693 -7.207,-40.968 -10.068,-40.968 -10.425,-41.325 -10.425,-46.125
VSYS on Top Layer (solid, pour order 231): 2.167,27.392 1.7,26.925 1.7,23.945 10.566,15 28.652,15 30.782,17.13 31.97,17.13 31.971,17.129 32.121,17.278 32.122,17.278 32.122,17.73 32.125,17.732 31.969,17.888 31.969,17.893 30.525,17.888 29.575,16.939 27.822,16.939 27.011,17.75 14.275,17.75 8.75,23.275 8.75,26.9 8.258,27.392 6.163,27.392
GND on Top Layer "Top Layer-GND" (solid, pour order 229): 28.32,19.917 28.164,19.765 28.176,18.233 28.371,18.038 29.615,18.038 29.819,18.241 29.819,19.79 29.692,19.917
5V on Top Layer (solid, pour order 206): 20.5,-14.375 22.6,-14.375 22.775,-14.2 22.775,-12.325 22.75,-12.3 21.45,-12.3 21.2,-12.05 21.2,-10.925 21.425,-10.7 23.675,-10.7 23.825,-10.55 23.825,-9.2 22.925,-8.3 22.925,-7.525 17.575,-2.175 17.575,2.75 17.075,3.25 14.75,3.25 14.25,2.75 14.25,-8.125
BOOT on Top Layer "BOOT_L01_P163" (solid, pour order 163): 12.2,-17.9 12.4,-17.7 13.375,-17.7 13.575,-17.9 13.575,-21.35 14.85,-22.625 14.85,-23.625 14.6,-23.875 12.375,-23.875 12.375,-23.825 12.2,-23.65
3V3 on Top Layer (solid, pour order 161): 6.9,-23.15 7.125,-22.925 7.125,-19.7 7.525,-19.3 9.325,-19.3 9.675,-19.65 9.675,-22.585 9.916,-22.85 11.825,-22.85 12.075,-22.6 12.075,-17.925 11.825,-17.675 3.175,-17.675 3.175,-19.44 3.175,-22.098 4.255,-23.15
GND on Top Layer "GND_L01_P162" (solid, pour order 162): 13.7,-17.9 13.9,-17.7 16.475,-17.7 16.8,-18.025 16.8,-23.575 16.525,-23.85 15.325,-23.85 15.075,-23.6 15.075,-22.65 13.7,-21.275
NRST on Top Layer "NRST_L01_P157" (solid, pour order 157): 23.438,-26.675 23.663,-26.45 28.488,-26.45 28.713,-26.675 28.713,-27.475 28.538,-27.65 23.638,-27.65 23.438,-27.45
3V3 on Top Layer "3V3_L01_P150" (solid, pour order 150): 2.75,-31.5 2.425,-31.825 2.425,-34.45 2.75,-34.775 4.675,-34.775 4.925,-34.525 4.925,-29.45 4.8,-29.325 3.3,-29.325 3.2,-29.425 3.2,-31.05
GND on Top Layer (solid, pour order 149): -21.618,-25.825 -21.618,-25.818 -21.35,-25.55 -18.5,-22.7 -7.044,-22.7 -4.575,-24.305 -4.575,-25.075 -4.75,-25.25 -14.65,-25.25 -15.18,-25.78 -15.18,-28.676 -15.411,-28.906 -21.202,-28.906 -21.64,-28.468
GND on Top Layer "Top Layer-GND" (solid, pour order 129): -21.639,-32.563 -21.795,-32.715 -21.783,-34.247 -21.588,-34.442 -20.343,-34.442 -20.14,-34.239 -20.14,-32.69 -20.267,-32.563
NetIC3_4 on Top Layer "Top Layer-NetIC1_4" (solid, pour order 127): -14.808,-31.318 -14.565,-31.075 -13.172,-31.075 -12.929,-31.318 -12.929,-36.297 -13.335,-36.703 -18.872,-36.703 -19.152,-36.424 -19.152,-35.56 -19.025,-35.433 -17.704,-35.433 -16.84,-34.569 -15.265,-34.569 -14.808,-34.112
NetC18_1 on Top Layer "NETC18_1_L01_P126" (solid, pour order 126): -19.228,-32.944 -19.05,-32.766 -15.24,-32.766 -15.037,-32.969 -15.037,-34.112 -15.265,-34.341 -16.815,-34.341 -17.958,-34.341 -19.101,-34.341 -19.228,-34.214
IC1_SW on Top Layer "Top Layer-IC1_SW" (solid, pour order 125): -28.702,-31.394 -28.372,-31.064 -15.189,-31.064 -15.011,-31.242 -15.011,-32.207 -15.215,-32.41 -21.791,-32.41 -21.791,-32.411 -21.942,-32.563 -21.946,-32.563 -21.946,-34.265 -21.957,-34.27 -21.632,-34.603 -20.343,-34.603 -20.236,-34.711 -20.236,-35.273 -20.238,-35.273 -20.333,-35.368 -22.036,-35.368 -22.86,-34.544 -26.314,-34.544 -28.499,-34.544 -28.702,-34.341
VSYS on Top Layer "Top Layer-12V" (solid, pour order 124): -28.702,-34.821 -28.529,-34.648 -28.504,-34.623 -22.941,-34.623 -22.078,-35.486 -21.62,-35.486 -20.325,-35.486 -19.375,-34.537 -17.931,-34.532 -17.931,-34.537 -17.775,-34.693 -17.778,-34.695 -17.778,-35.147 -17.779,-35.147 -17.929,-35.296 -17.93,-35.295 -19.118,-35.295 -21.239,-37.417 -28.108,-37.417 -28.702,-36.807
VSYS on Bottom Layer (solid, pour order 232): 2.4,23.241 1.7,23.941 1.7,26.925 2.167,27.392 8.258,27.392 8.75,26.9 8.75,23.241 8.784,23.241 14.275,17.75 27,17.75 27.625,17.125 27.625,15.75 26.875,15 10.567,15
NetQ1_5 on Bottom Layer "NETQ1_5_L04_P061" (solid, pour order 61): -18.288,34.075 -18.275,34.075 -17.8,34.544 -13.335,34.544 -12.827,34.036 -11.557,34.036 -11.557,29.464 -12.954,29.464 -13.462,28.956 -17.831,28.956 -18.312,29.437 -18.288,29.475
VBOT on Bottom Layer "VBOT_L04_P064" (solid, pour order 64): -20.063,13.077 -21.333,14.347 -21.333,19.935 -17.015,24.253 -12.697,24.253 -12.697,23.745 -11.3,21.586 -11.3,12.061 -9.268,10.029 -9.268,9.013 -8.126,7.999 -8.534,7.591 -9.656,6.469 -11.427,7.414 -11.427,8.124 -16.38,13.077
VMID on Bottom Layer (solid, pour order 199): 11.589,-11.461 13.139,-11.461 13.194,-11.406 14.025,-10.575 14.025,9.7 10.717,13.008 10.609,12.9 -10.3,12.9 -13.65,9.55 -13.65,-7.775 -11.05,-10.375 -10.136,-10.389 -6.096,-6.35 -9.144,-3.302 -9.144,-0.254 -9.157,-0.254 -9.157,2.685 -5.474,6.368 -5.474,6.382 -2.857,8.89 0.191,9.017 0.191,9.022 3.365,8.89 5.982,6.382 5.982,6.368 9.652,2.698 9.652,-3.429 6.604,-6.477
3V3 on Bottom Layer (solid, pour order 221): -0.225,-15.925 3.625,-15.925 4.05,-15.5 4.05,-13.875 3.85,-13.675 3.475,-13.675 3.375,-13.775 0.1,-13.775 -0.125,-13.55 -0.125,-12.05 -0.225,-11.95 -0.7,-11.95 -1.025,-12.275 -2.625,-12.275 -2.725,-12.375 -2.725,-13.425 -2.675,-13.475
GND on Bottom Layer (solid, pour order 219): -0.049,-11.75 0.025,-11.827 0.025,-13.475 0.075,-13.525 1.2,-13.525 1.275,-13.45 1.275,-11.282 0.996,-11.004 -1.336,-11.004 -1.615,-10.725 -2.65,-10.725 -2.75,-10.825 -2.75,-11.85 -2.625,-11.975 -1,-11.975 -0.775,-11.75
VBUS on POWER "POWER-VBUS" (solid, pour order 113): -2.391,48.084 -2.423,48.052 -2.423,46.31 -1.012,44.9 0.55,44.9 2.283,43.167 2.283,43.021 2.052,42.79 1.732,42.79 1.44,42.79 1.412,42.762 1.412,42.363 1.45,42.325 3.65,42.325 4.164,42.839 4.164,44.316 4.164,46.215 3.021,46.849 3.021,48.004 2.901,48.124 2.424,48.124 2.318,48.018 2.318,46.943 2.238,46.863 -1.589,46.863 -1.778,47.054 -1.778,48.052 -1.81,48.084
NetQ1_5 on POWER "NETQ1_5_L03_P060" (solid, pour order 60): -18.288,34.05 -17.8,34.538 -17.8,34.544 -13.335,34.544 -12.827,34.036 -11.557,34.036 -11.557,29.464 -12.954,29.464 -13.462,28.956 -17.831,28.956 -18.288,29.425
5V on POWER "5V_L03_P087" (solid, pour order 87): 39.175,29.325 40.25,28.25 40.259,28.2 40.259,9.271 43.815,5.715 43.815,-2.54 29.21,-17.145 -36.43,-17.145 -41.7,-11.875 -41.7,9.1 -38.862,11.938 6.426,11.938 20.88,29.325
3V3 on POWER (solid, pour order 259): -28.125,-23.344 -28.125,-25.053 -27.952,-25.648 -22.25,-31.35 -22.25,-39.472 -8.636,-53.086 8.636,-53.086 26.035,-35.687 26.035,-24.511 19.431,-17.907 4.699,-17.907 2.032,-20.574 -7.62,-20.574 -9.721,-22.675 -27.59,-22.675
VSYS on POWER "VSYS_L03_P081" (solid, pour order 81): 5.866,27.11 5.906,27.15 7.45,27.15 7.45,22.959 3.005,22.959 3.005,27.15 4.783,27.15 5.799,27.15
VSYS on POWER (solid, pour order 257): 8.077,22.352 8.75,23.025 8.75,26.739 3.578,28.75 -30.305,28.75 -46.2,12.855 -46.2,-15.825 -28.725,-33.3 -28.725,-34.8 -28.725,-37.175 -28.025,-37.875 -23.325,-37.875 -23.325,-37.85 -22.606,-37.125 -22.606,-31.544 -42.075,-12.075 -42.075,9.175 -26.993,24.257 -8.763,24.257 -6.858,22.352
GND on GND "GND-Plane" (solid, pour order 48): -54.998,-0.381 ccw(c0.254,-0.381) 0.254,-55.633 ccw(c0.254,-0.381) 55.506,-0.381 ccw(c0.254,-0.381) 0.254,54.871 ccw(c0.254,-0.381)